# Altium PCB DO NOT USELKAS-EPS_PCB_V2I2.PcbDoc
Units mil, origin at the board's own origin, x right, y up, seen from the top; angles counter-clockwise.
Board outline 2181 x 1417 mil, 2 copper layers (Top Layer, Bottom Layer); 49 components, 66 nets, 230 pads, 22 vias.
Unrouted connection lines stored in the file: 19.
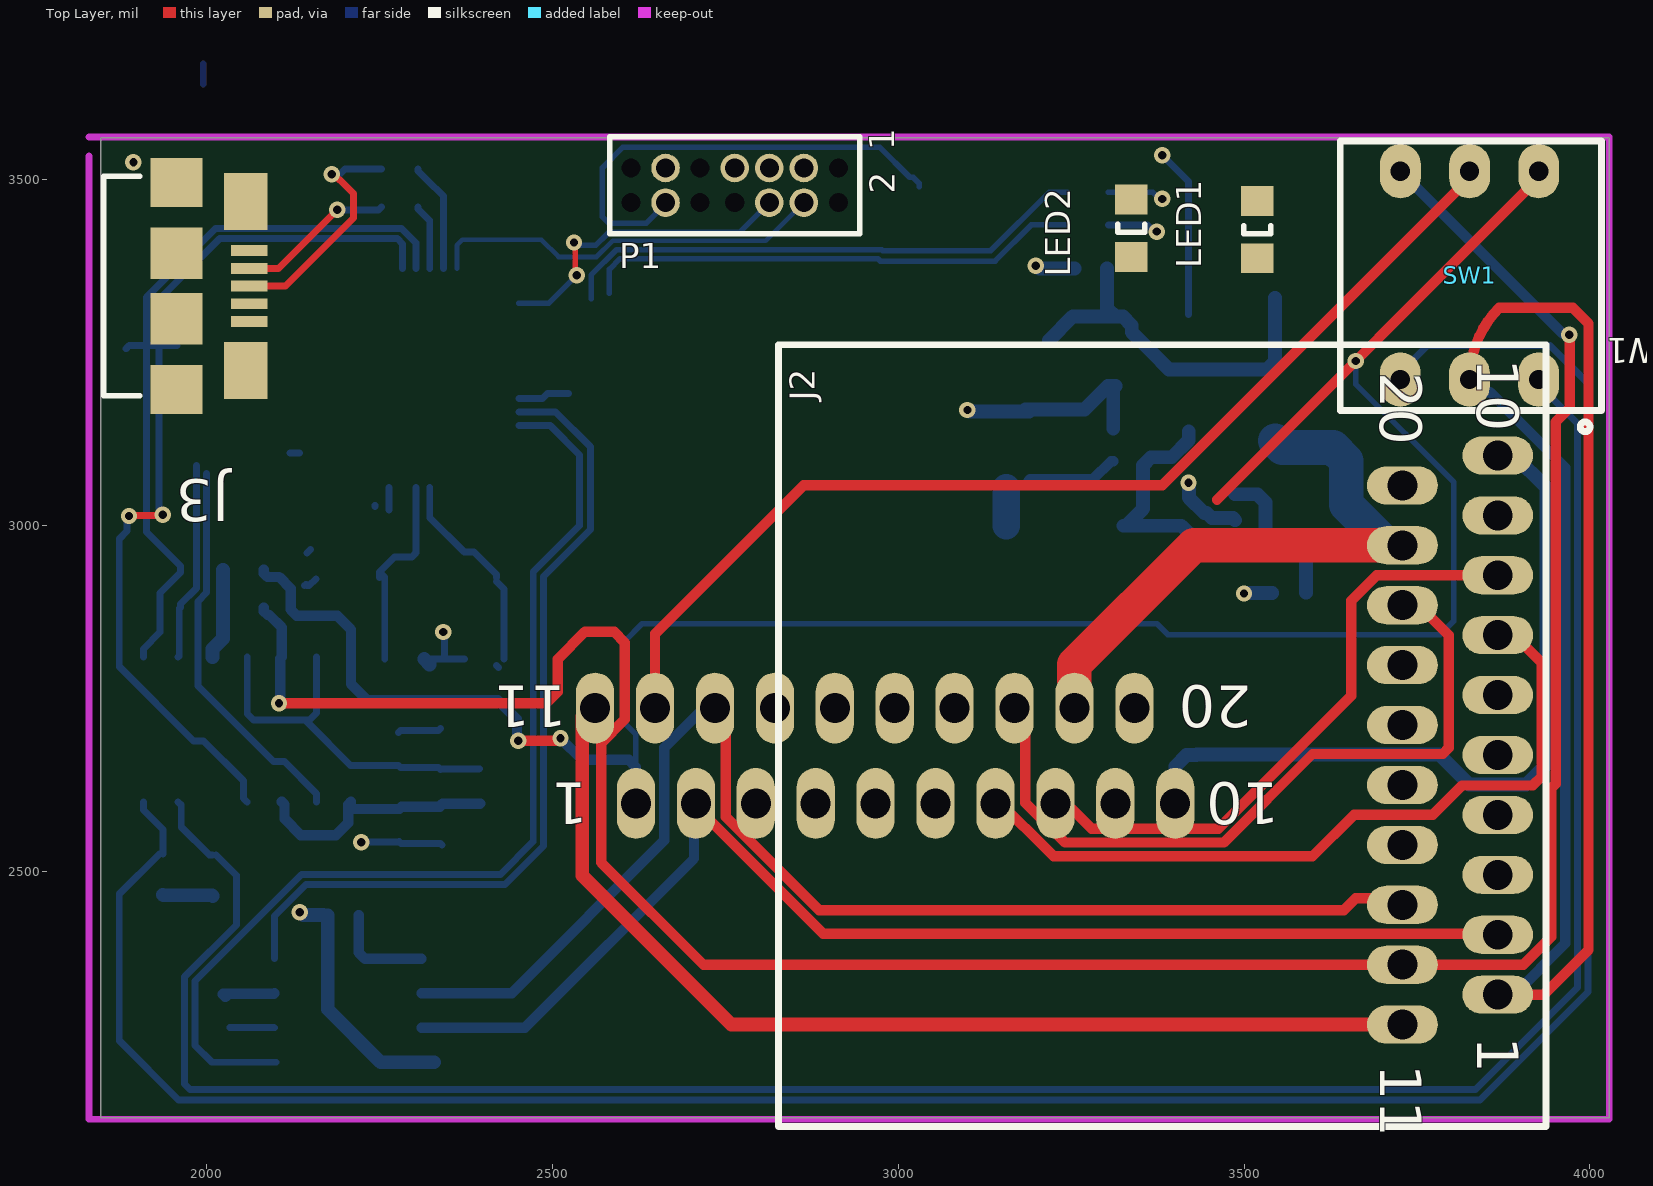
[diagram p0: Top Layer view]
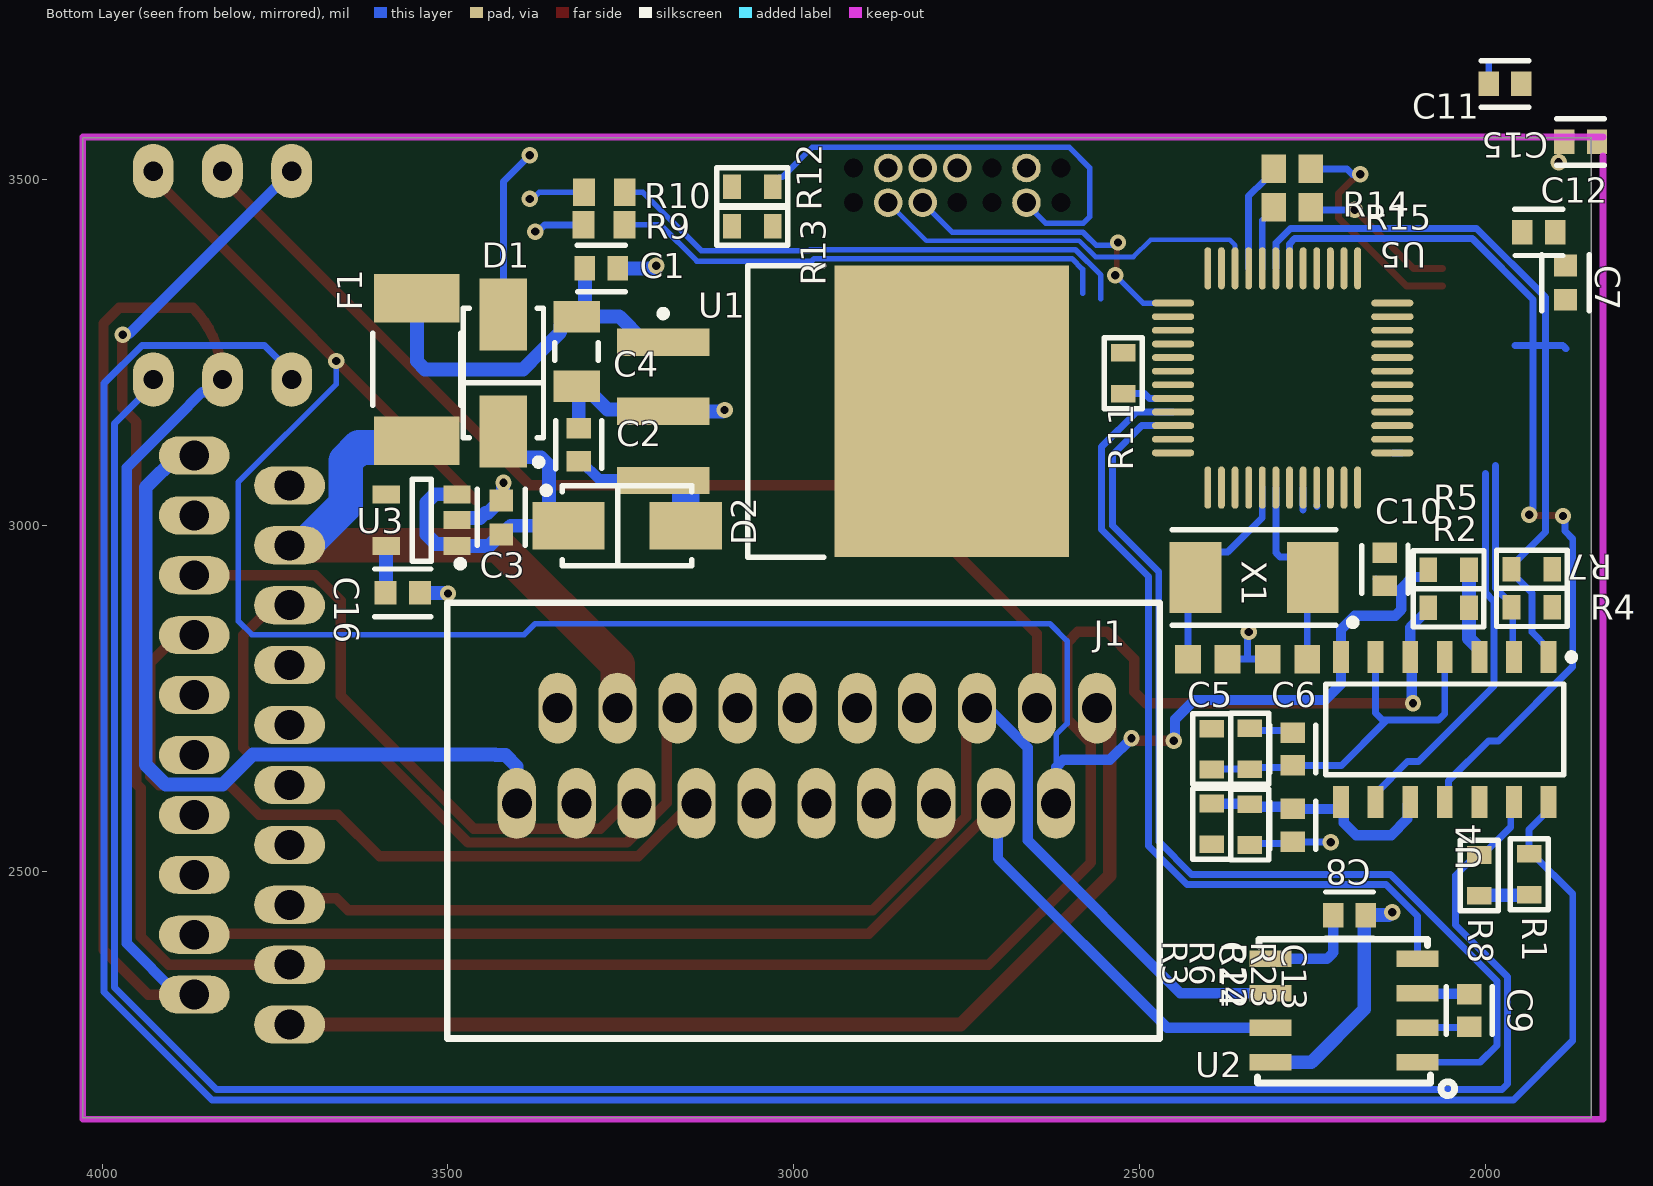
[diagram p1: Bottom Layer view, seen from below]
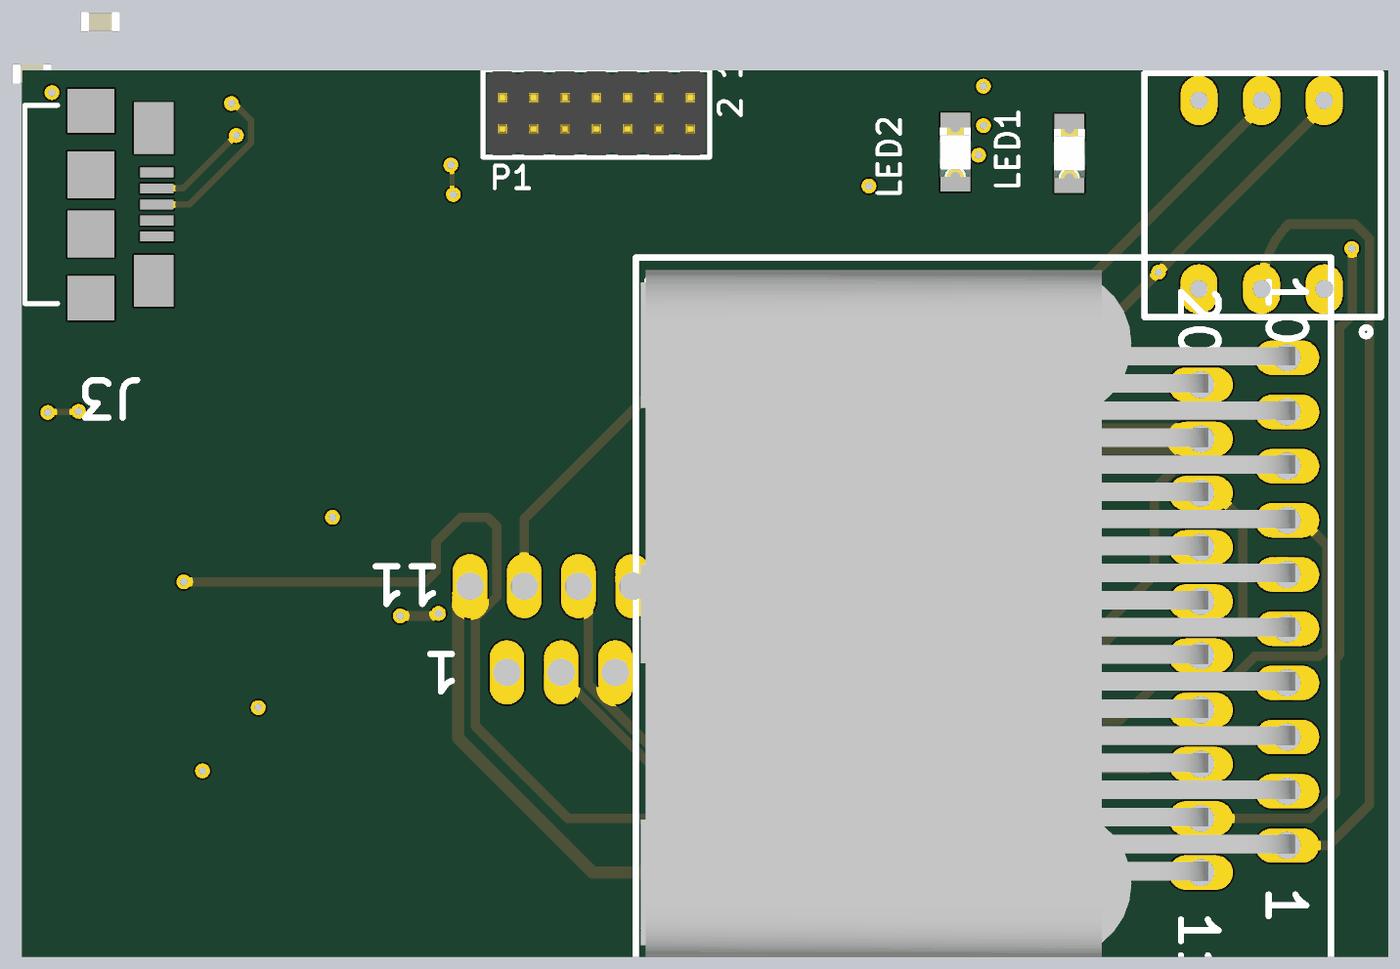
[diagram p2: 3D render of the assembled board from above, using the file's embedded part models]
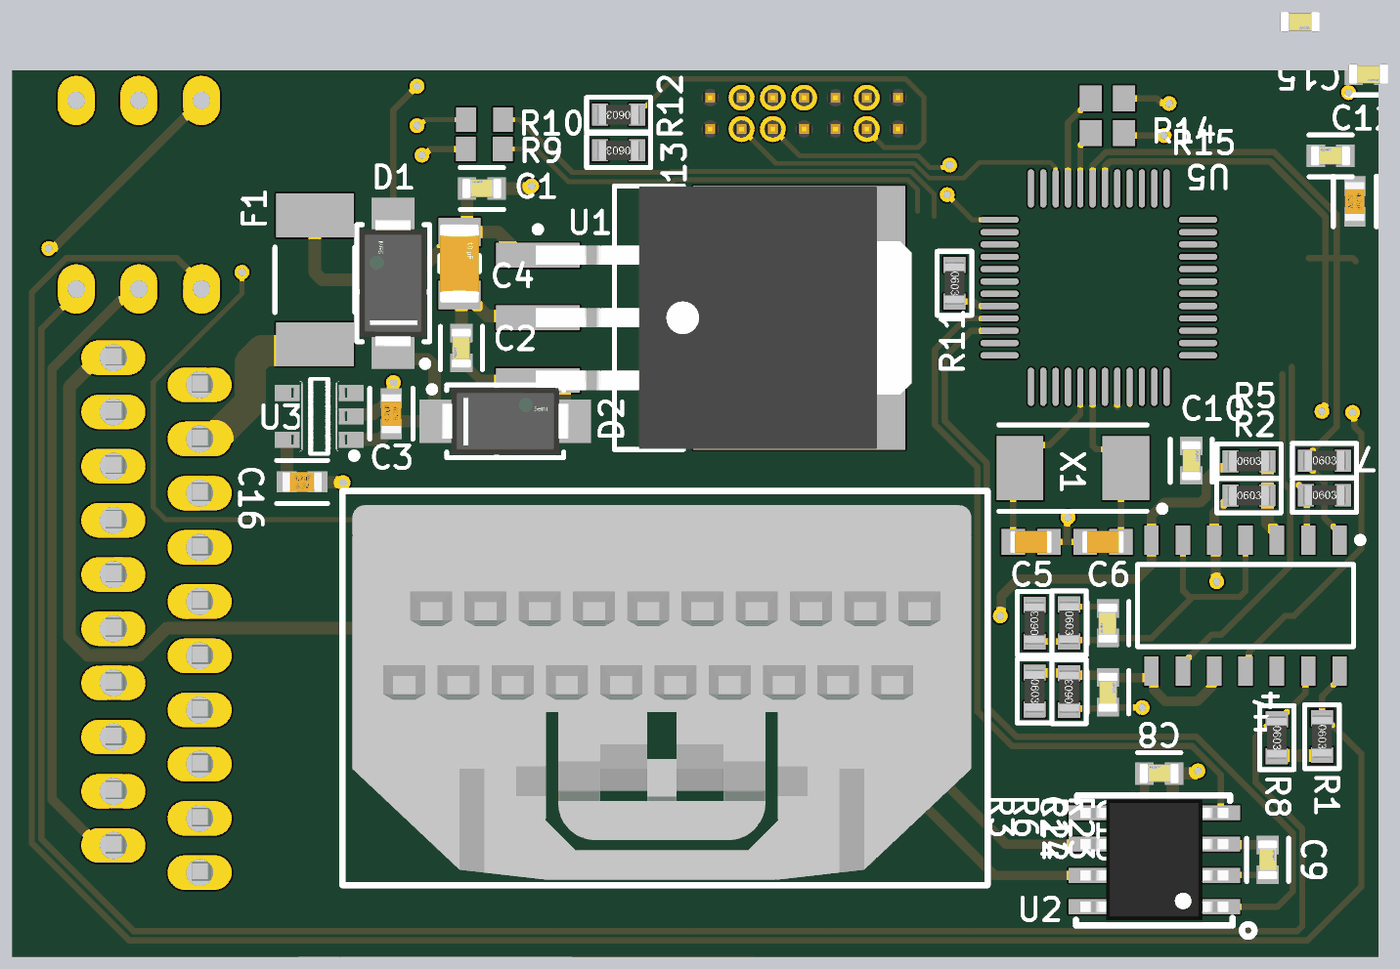
[diagram p3: 3D render of the assembled board from below, using the file's embedded part models]

## Layer stack, top to bottom
Top Solder: solder mask 0.4, Solder Resist, Dk 3.5
Top Layer: signal copper 1.378
Dielectric1: dielectric 12.6, FR-4, Dk 4.8
Bottom Layer: signal copper 1.378
Bottom Solder: solder mask 0.4, Solder Resist, Dk 3.5

## Board outline
1847,2144 4028,2144 4028,3561 1847,3561

## Design rules (kind name [scope] priority, off if disabled: settings)
BoardOutlineClearance [All] p1: gap=7.87 ignorepadtopadclearanceinfootprint=FALSE
Clearance [All] p1: gap=5 ignorepadtopadclearanceinfootprint=FALSE except(9.84: Arc-Hole Track-Hole SMDPad-Hole THPad-Hole Via-Hole Fill-Hole Poly-Hole Region-Hole Text-Hole)
ComponentClearance [All] p1: gap=5 collisioncheckmode=3 verticalgap=5 showdistances=TRUE
DiffPairsRouting [All] p1: maxlimit=10 minlimit=5 mostfreqgap=5 toplayer_minwidth=5 toplayer_maxwidth=1000 toplayer_prefwidth=5 bottomlayer_minwidth=5 bottomlayer_maxwidth=1000 bottomlayer_prefwidth=5 maxuncoupledlength=500
Height [All] p1: minheight=0 maxheight=71497.94 prefheight=500
HoleSize [All] p1: absolutevalues=TRUE maxlimit=248.03 minlimit=11.81 maxpercent=80.000 minpercent=20.000
HoleToHoleClearance [All] p1: gap=9.84 allowstackedmicrovias=FALSE
MinimumAnnularRing [All] p1: minimumring=3
MinimumSolderMaskSliver [All] p1: minsoldermaskwidth=0
PlaneClearance [All] p1: clearance=5
PlaneConnect PlaneConnectPowerPads [InPadClass('PowerPads')] p1: planeconnectstyle=Direct reliefexpansion=20 reliefentries=4 reliefconductorwidth=10 reliefairgap=10
PlaneConnect [All] p2: pad.planeconnectstyle=Relief pad.reliefexpansion=11.81 pad.reliefentries=4 pad.reliefconductorwidth=39.37 pad.reliefairgap=5 via.planeconnectstyle=Direct via.reliefexpansion=11.81 via.reliefentries=4 via.reliefconductorwidth=5 via.reliefairgap=5
PolygonConnect PolygonConnectPowerPads [All vs (InPadClass('PowerPads'))] p1: connectstyle=Direct reliefconductorwidth=10 reliefentries=4 polygonreliefangle="90 Angle" airgapwidth=10
PolygonConnect [All] p2: thpad.connectstyle=Relief thpad.reliefconductorwidth=39.37 thpad.reliefentries=4 thpad.polygonreliefangle="90 Angle" thpad.airgapwidth=5 smdpad.connectstyle=Relief smdpad.reliefconductorwidth=39.37 smdpad.reliefentries=4 smdpad.polygonreliefangle="90 Angle" smdpad.airgapwidth=5 via.connectstyle=Direct via.reliefconductorwidth=5 via.reliefentries=4 via.polygonreliefangle="90 Angle" via.airgapwidth=5
RoutingVias [All] p1: holewidth=11.81 width=23.62 viastyle="Through Hole" minholewidth=11.81 minwidth=23.62 maxholewidth=100 maxwidth=259.84
SilkToSilkClearance [All] p1: silktosilkclearance=0
SilkToSolderMaskClearance [IsPad] p1: minsilkscreentomaskgap=5 clearancetoexposedcopper=TRUE
SolderMaskExpansion [All] p1: expansion=2.95 istentingtop=FALSE
Width [All] p1: maxlimit=1000 minlimit=5 preferedwidth=5 minimp=50.000000 maximp=50.000000 favimp=50.000000
20 further rules are at their usual default settings.

## Classes and differential pairs
differential pair USB_R: +USB_R_P -USB_R_N
differential pair USB: +USB_P -USB_N

## Components (designator, comment, footprint, x,y, rotation, side; value= is the part's Value field where it differs from the comment)
C1 "C0603C104M3RACTU" FP-C0603C-CF-MFG 3278.38,3372 r180 bottom value="0.10 μF"
C2 "C0603C104M3RACTU" FP-C0603C-CF-MFG 3311,3117 r90 bottom value="0.10 μF"
C3 "CL10B475KQ8NQNC" FP-CL10-IPC_C 3423,3012 r90 bottom value=4.7uF
C4 "CL31A106KBHNNNE" FP-CL31-IPC_C 3314,3252 r270 bottom value=10uF
C5 "GRM1885C1H220JA01D" CAPC1608X90X35ML10T15 2401.57,2807.09 r180 bottom
C6 "GRM1885C1H220JA01D" CAPC1608X90X35ML10T15 2286.42,2807.09 r0 bottom
C7 "CL10B475KQ8NQNC" FP-CL10-IPC_C 1884.48,3351.28 r270 bottom value=4.7uF
C8 "C0603C104M3RACTU" FP-C0603C-CF-MFG 2196.85,2437.01 r180 bottom value="0.10 μF"
C9 "C0603C104M3RACTU" FP-C0603C-CF-MFG 2023.62,2299.21 r270 bottom value="0.10 μF"
C10 "C0603C104M3RACTU" FP-C0603C-CF-MFG 2145.67,2937.01 r270 bottom value="0.10 μF"
C11 "C0603C104M3RACTU" FP-C0603C-CF-MFG 1971.85,3638.61 r0 bottom value="0.10 μF"
C12 "C0603C104M3RACTU" FP-C0603C-CF-MFG 1923.23,3424.21 r180 bottom value="0.10 μF"
C13 "C0603C104M3RACTU" FP-C0603C-CF-MFG 2278.85,2677.19 r90 bottom value="0.10 μF"
C14 "C0603C104M3RACTU" FP-C0603C-CF-MFG 2278.73,2566.93 r270 bottom value="0.10 μF"
C15 "C0603C104M3RACTU" FP-C0603C-CF-MFG 1862.57,3554.85 r0 bottom value="0.10 μF"
C16 "CL10B475KQ8NQNC" FP-CL10-IPC_C 3565.35,2903 r180 bottom value=4.7uF
D1 "SS14" FP-403AE-MFG 3420,3220.65 r270 bottom
D2 "SS14" FP-403AE-MFG 3241,3000 r0 bottom
F1 "1812L050/30PR" LFUS-1812L05030PR_V 3545,3226.05 r90 bottom
J1 "MX34020SF1" MX34020SF1 3391,2808.63 r180 bottom
J2 "MX34020NF1" MX34020NF1 3866.8,3101.61 r270 top
J3 "10118192-0001LF" FCI-10118192-0001LF-5_V 1956.69,3346.46 r270 top
LED1 "150080SS75000" 0805_A 3519,3428 r90 top
LED2 "150080BS75000" 0805_A 3337,3430 r90 top
P1 "62201421121" 62201421121 2763.78,3492.13 r180 top
R1 "4K7" R0603 1937.01,2496.06 r270 bottom
R2 "4K7" R0603 2053.54,2881.16 r180 bottom
R3 "4K7" R0603 2395.73,2568.93 r270 bottom
R4 "4K7" R0603 1933.07,2881.89 r180 bottom
R5 "4K7" R0603 2053.49,2936.16 r180 bottom
R6 "4K7" R0603 2340.73,2567.93 r90 bottom
R7 "4K7" R0603 1933.07,2937 r180 bottom
R8 "4K7" R0603 2009.1,2494.42 r270 bottom
R9 "RC0603FR-07560RL" RESC1608X55X25ML10T15 3274.47,3435 r0 bottom
R10 "RC0603FR-07560RL" RESC1608X55X25ML10T15 3274,3482 r0 bottom
R11 "4K7" R0603 2523.62,3220.47 r270 bottom
R12 "4K7" R0603 3060,3490 r0 bottom
R13 "4K7" R0603 3060,3433 r0 bottom
R14 "CRCW060322R0JNTA" RESC1609X50X30ML10T20 2279.53,3460.63 r180 bottom value=22R
R15 "CRCW060322R0JNTA" RESC1609X50X30ML10T20 2279.53,3515.75 r180 bottom value=22R
R22 "4K7" R0603 2395.73,2677.17 r90 bottom
R23 "4K7" R0603 2340.73,2677.69 r270 bottom
SW1 "76STC02T" 76STC02T 3826,3362 r180 top
U1 "UA7805CKTTR" KTT0003A_V 2929.13,3165.35 r180 bottom
U2 "MCP2562FD-E/SN" MCP2561 2204.72,2299.21 r0 bottom
U3 "MIC5504-3.3YM5-TR" FP-SOT23-5LD-PL-1-MFG 3538,3008 r0 bottom
U4 "LM339DR2G" ONSC-SOIC-14-751A-03_V 2059,2705.44 r270 bottom
U5 "STM32F103C6T7ATR" STM-LQFP48_L 2293.31,3213.58 r90 bottom
X1 "ABM7-8.000MHZ-D2Y-T" ABRA-ABM7-2_V 2334.65,2925.2 r0 bottom

## Footprints (in the part's own frame and the unit in brackets; to place one, negate y for a bottom-side part, rotate by r counter-clockwise, add the part's x,y. Pads: shape width x height; smd on the part's side, far side on the other; paste and mask are expansions set on the pad)
76STC02T [mm] "Switch Rocker Arm"
  oval 1.5x2 hole 0.71: 1A(-2.538,3.827) 1B(-2.542,-3.827) 2A(2.542,3.827) 2B(2.538,-3.827) C1(0.002,3.827) C2(-0.002,-3.827)
  silkscreen extent -4.85,-4.93 4.75,5.74
0805_A [mm] "Chip LED, 2-Leads, Body 2.0x1.3mm, IPC Medium Density"
  rect 1.1x1.2 smd: 1(-1.05,0) 2(1.05,0)
  silkscreen extent -0.15,-0.5 0.15,0.5, body extent -1,-0.63 1,0.62, height 0.68
62201421121 [mm] "Pin Header, pitch 1.27 mm, THT, Vertical, dual row, 14p"
  round 0 hole 0.7 unplated: 1(-3.81,-0.635) 2(-3.81,0.635) 8(0,0.635) 9(1.27,-0.635) 10(1.27,0.635) 13(3.81,-0.635) 14(3.81,0.635)
  round 1.05 hole 0.7: 3(-2.54,-0.635) 4(-2.54,0.635) 5(-1.27,-0.635) 6(-1.27,0.635) 7(0,-0.635) 11(2.54,-0.635) 12(2.54,0.635)
  silkscreen extent -4.59,-1.78 4.59,1.78, body extent -4.44,-1.7 4.45,1.7, height 5.33
ABRA-ABM7-2_V [mm] "SMD, 2-Leads, Body 6x3.5mm"
  rect 1.9x2.6 smd: 1(-2.15,0) 2(2.15,0)
  silkscreen extent -3.75,-1.75 3,1.78, body extent -3,-1.75 3,1.75, height 1.4
CAPC1608X90X35ML10T15 [mm] "Chip Capacitor, 2-Leads, Body 1.7x0.9mm, IPC Low Density"
  rect 0.95x1.05 smd: 1(-0.725,0) 2(0.725,0)
  body extent -0.85,-0.45 0.85,0.45, height 0.9
FCI-10118192-0001LF-5_V [mm] "SMD, 5-Leads, Body 8.05x5.77mm, Pitch 0.65mm"
  rect 0.4x1.35 smd: 1(-1.3,2.675) 2(-0.65,2.675) 3(0,2.675) 4(0.65,2.675) 5(1.3,2.675)
  rect 2.1x1.6 smd: 6(-3.1,2.55) 7(3.1,2.55)
  rect 1.8x1.9 smd: 8(-3.8,0) 9(3.8,0)
  rect 1.9x1.9 smd: 10(-1.2,0) 11(1.2,0)
  silkscreen extent -4.03,-2.67 4.03,-1.35, body extent -4.03,-2.67 4.03,3.1, height 2.7
FP-403AE-MFG [mm]
  rect 2.65x1.75 smd paste+0 mask+0: 1(-2.15,0) 2(2.15,0)
  silkscreen extent -2.37,-1.48 3.39,1.48, body extent -2.6,-1.36 2.6,1.36, height 2.5
FP-C0603C-CF-MFG [mm]
  rect 0.75x0.9 smd paste+0 mask+0: 1(-0.6,0) 2(0.6,0)
  silkscreen extent -0.87,-0.85 0.88,0.85, body extent -0.8,-0.4 0.8,0.4, height 0.87
FP-CL10-IPC_C [mil]
  rect 31.73x33.79 smd paste+0 mask+0: 1(-24.65,0) 2(24.65,0)
  silkscreen extent -41,-34 41,34, body extent -31,-16 31,16, height 37
FP-CL31-IPC_C [mil]
  rect 45.45x67.17 smd: 1(-50.23,0) 2(50.23,0)
  silkscreen extent -13,-31 13,31, body extent -63,-31 63,31, height 71
FP-SOT23-5LD-PL-1-MFG [mm]
  rect 1x0.66 smd paste+0 mask+0: 1(-1.3,0.95) 2(-1.3,0) 3(-1.3,-0.95) 4(1.3,-0.95) 5(1.3,0.95)
  silkscreen extent -1.54,-1.5 0.35,1.72, body extent -1.4,-1.45 1.4,1.45, height 1.45
KTT0003A_V [mm] "DPAK, 3-Leads, Body 10.65x9.65mm, Pitch 2.54mm"
  rect 3.4x1 smd: 1(-6.6,2.54) 2(-6.6,0) 3(-6.6,-2.54)
  rect 8.6x10.7 smd: 4(4,0)
  silkscreen extent -6.73,-5.35 -0.7,5.35, body extent -6.68,-5.32 8.56,5.32, height 4.83
LFUS-1812L05030PR_V [mm] "SMD, 2-Leads, Body 4.55x3.24mm"
  rect 1.78x3.15 smd: 1(-2.615,0) 2(2.615,0)
  silkscreen extent -1.33,-1.62 1.33,1.62, body extent -2.27,-1.62 2.27,1.62, height 1
MCP2561 [mm] "SOIC 8 SN type"
  rect 1.55x0.6 smd: 1(-2.7,1.905) 2(-2.7,0.635) 3(-2.7,-0.635) 4(-2.7,-1.905) 5(2.7,-1.905) 6(2.7,-0.635) 7(2.7,0.635) 8(2.7,1.905)
  silkscreen extent -4.06,-2.62 3.17,3.12, body extent -3,-2.45 3,2.45, height 1.75
MX34020NF1 [mm] "Receptical with male pins"
  oval 1.4x2.6 hole 1.1: 1(19.8,0) 2(17.6,0) 3(15.4,0) 4(13.2,0) 5(11,0) 6(8.8,0) 7(6.6,0) 8(4.4,0) 9(2.2,0) 10(0,0) 11(20.9,-3.5) 12(18.7,-3.5) 13(16.5,-3.5) 14(14.3,-3.5) 15(12.1,-3.5) 16(9.9,-3.5) 17(7.7,-3.5) 18(5.5,-3.5) 19(3.3,-3.5) 20(1.1,-3.5)
  round 0 all layers, no hole: ""(-0.5,-9.3) ""(21.5,-9.3)
  silkscreen extent -4.06,-26.42 24.64,1.78, body extent -3.56,-26.21 24.34,0.31, height 16
MX34020SF1 [mm] "Plug without pins"
  oval 1.4x2.6 hole 1.1: 1(19.558,-5.334) 2(17.358,-5.334) 3(15.158,-5.334) 4(12.958,-5.334) 5(10.758,-5.334) 6(8.558,-5.334) 7(6.358,-5.334) 8(4.158,-5.334) 9(1.958,-5.334) 10(-0.242,-5.334) 11(21.058,-1.834) 12(18.858,-1.834) 13(16.658,-1.834) 14(14.458,-1.834) 15(12.258,-1.834) 16(10.058,-1.834) 17(7.858,-1.834) 18(5.658,-1.834) 19(3.458,-1.834) 20(1.258,-1.834)
  silkscreen extent -2.79,-13.97 23.37,2.03, body extent -2.39,-13.75 22.71,1.45, height 21
ONSC-SOIC-14-751A-03_V [mm] "SOIC, 14-Leads, Body 8.75x4mm, Pitch 1.27mm"
  rect 1.18x0.58 smd: 1(-2.66,3.81) 2(-2.66,2.54) 3(-2.66,1.27) 4(-2.66,0) 5(-2.66,-1.27) 6(-2.66,-2.54) 7(-2.66,-3.81) 8(2.66,-3.81) 9(2.66,-2.54) 10(2.66,-1.27) 11(2.66,0) 12(2.66,1.27) 13(2.66,2.54) 14(2.66,3.81)
  silkscreen extent -2.78,-4.37 1.67,4.77, body extent -2,-4.38 2,4.38, height 1.75
R0603 [mm]
  rect 0.65x0.9 smd: 1(-0.75,0) 2(0.75,0)
  silkscreen extent -1.3,-0.7 1.3,0.7, body extent -1.05,-0.4 1.05,0.4, height 0.5
RESC1608X55X25ML10T15 [mm] "Chip Resistor, 2-Leads, Body 1.70x0.90mm, IPC Low Density"
  rect 0.8x1 smd: 1(-0.75,0) 2(0.75,0)
  body extent -0.85,-0.45 0.85,0.45, height 0.55
RESC1609X50X30ML10T20 [mm] "Chip Resistor, 2-Leads, Body 1.55x0.85mm, IPC Low Density"
  rect 0.9x1.05 smd: 1(-0.675,0) 2(0.675,0)
  body extent -0.82,-0.48 0.82,0.48, height 0.5
STM-LQFP48_L [mm] "QFP, 48-Leads, Body 7x7mm, Pitch 0.5mm, IPC High Density"
  oval 1.55x0.25 smd: 1(-4.025,2.75) 2(-4.025,2.25) 3(-4.025,1.75) 4(-4.025,1.25) 5(-4.025,0.75) 6(-4.025,0.25) 7(-4.025,-0.25) 8(-4.025,-0.75) 9(-4.025,-1.25) 10(-4.025,-1.75) 11(-4.025,-2.25) 12(-4.025,-2.75) 25(4.025,-2.75) 26(4.025,-2.25) 27(4.025,-1.75) 28(4.025,-1.25) 29(4.025,-0.75) 30(4.025,-0.25) 31(4.025,0.25) 32(4.025,0.75) 33(4.025,1.25) 34(4.025,1.75) 35(4.025,2.25) 36(4.025,2.75)
  oval 0.25x1.55 smd: 13(-2.75,-4.025) 14(-2.25,-4.025) 15(-1.75,-4.025) 16(-1.25,-4.025) 17(-0.75,-4.025) 18(-0.25,-4.025) 19(0.25,-4.025) 20(0.75,-4.025) 21(1.25,-4.025) 22(1.75,-4.025) 23(2.25,-4.025) 24(2.75,-4.025) 37(2.75,4.025) 38(2.25,4.025) 39(1.75,4.025) 40(1.25,4.025) 41(0.75,4.025) 42(0.25,4.025) 43(-0.25,4.025) 44(-0.75,4.025) 45(-1.25,4.025) 46(-1.75,4.025) 47(-2.25,4.025) 48(-2.75,4.025)
  body extent -3.5,-3.5 3.5,3.5, height 1.6

## Part data
C1 C2 C8 C9 C10 C11 C12 C13 C14 C15: library part CMP-2006-03065-2, "CAP CER 0.1UF 25V X7R 0603", Capacitance="0.1 μF", Manufacturer=KEMET, Package=C0603C-CF, Temperature="-55°C to +125°C", Temperature Characteristic=X7R, Temperature Coefficient=30ppm/°C, Temperature Range High=+125°C, Temperature Range Low=-55°C, Tolerance=0.2, Voltage Rating="25 V", Automotive=Yes, Automotive Grade="Grade 1", Category=Cap, ComponentLink2Description=Datasheet, ComponentLink2URL=https://api.kemet.com/component-edge/download/datasheet/C0603C100J5GACAUTO.pdf, Device Class L1="Passive Components", Device Class L2=Capacitors, Device Class L3="Ceramic Capacitors", Digikey Description="CAP CER 0.1UF 25V X7R 0603", Height=0.87mm, Lead Free=Yes, Manufacturer Part Number=C0603C104M3RACTU, Material=Ceramic, Mouser Description="Multilayer Ceramic Capacitors MLCC - SMD/SMT 25volts 0.1uF X7R 20%", Octopart=https://octopart.com/c0603c104m3ractu-kemet-95914, RoHS=TRUE
C3 C7 C16: library part CMP-2000-06096-2, "CAP CER 4.7UF 6.3V X7R 0603", Capacitance=4.7uF, Manufacturer=Samsung, Package=CL10, Temperature="-55°C to +125°C", Temperature Characteristic=X7R, Temperature Coefficient=15%, Temperature Range High=+125°C, Temperature Range Low=-55°C, Tolerance=10%, Voltage Rating=6.3V, Automotive=No, Category=Cap, ComponentLink2Description=Datasheet, ComponentLink2URL=http://www.samsungsem.com/kr/support/product-search/mlcc/__icsFiles/afieldfile/2018/07/24/CL10B475KQ8NQNC.pdf, Device Class L1="Passive Components", Device Class L2=Capacitors, Device Class L3="Ceramic Capacitors", Digikey Description="CAP CER 4.7UF 6.3V X7R 0603", Height=0.95mm, Ipc Land Pattern Name=CAPC16080X80, Lead Free=Yes, Manufacturer Part Number=CL10B475KQ8NQNC, Material=Ceramic, Mouser Description="C Series 0402 4.7 uF 6.3 V ±20 % Tolerance X5R SMT Multilayer Ceramic Capacitor", Octopart=https://octopart.com/cl10b475kq8nqnc-samsung-24957976, RoHS=TRUE
C4: library part CMP-13271-000016-1, "CAP CER 10UF 50V X5R 1206", Capacitance=10uF, Manufacturer=Samsung, Package=CL31, Temperature="-55°C to +85°C", Temperature Characteristic=X5R, Temperature Coefficient=15%, Temperature Range High=+85°C, Temperature Range Low=-55°C, Tolerance=10%, Voltage=50V, Automotive=No, Category=Cap, ComponentLink2Description=Datasheet, ComponentLink2URL=http://www.samsungsem.com/kr/support/product-search/mlcc/__icsFiles/afieldfile/2018/06/21/CL31A106KBHNNNE.pdf, Device Class L1="Passive Components", Device Class L2=Capacitors, Device Class L3="Ceramic Capacitors", Digikey Description="CAP CER 10UF 50V X5R 1206", Height=1.8mm, Ipc Land Pattern Name=CAPC320160X160, Lead Free=Yes, Manufacturer Part Number=CL31A106KBHNNNE, Material=Ceramic, Octopart=https://octopart.com/cl31a106kbhnnne-samsung-19832778, RoHS=TRUE, Voltage Rating=50V
C5 C6: library part CMP-2000-04945-1, "Chip Capacitor, 22 pF, +/- 5%, 50 V, -55 to 125 degC, 0603 (1608 Metric), RoHS, Tape and Reel", Capacitance=22pF, Case Size/Dimension=0603, Dielectric=C0G, Manufacturer=Murata, Package Description="2-Pin Surface Mount Device, Body 1.6 x 0.8 mm", Package Reference=603, Rated Voltage=50V, Tolerance (%)=±5%, Datasheet URL=https://datasheet.ciiva.com/11786/0900766b807a1cab-11786398.pdf, Datasheet Version=Jul-06, Manufacturer URL=http://www.murata.com/
D1 D2: library part CMP-2000-04943-2, "DIODE SCHOTTKY 40V 1A SMA", Forward Current=1A, Manufacturer="ON Semiconductor", Max Junction Temp=+125°C, Max Repetitive Reverse Voltage=40V, Max Surge Forward Current=40A, Package=403AE, Peak Reverse Current=0.2mA, Temperature="-65°C to +125°C", Temperature Range Low=-65°C, Automotive=No, Category=Diode, ComponentLink2Description=Datasheet, ComponentLink2URL=https://www.onsemi.com/pub/Collateral/SS19-D.PDF, Device Class L1="Discrete Semiconductors", Device Class L2=Diodes, Device Class L3="Schottky Diodes", Digikey Description="DIODE SCHOTTKY 40V 1A SMA", Height=2.5mm, Lead Free=Yes, Manufacturer Part Number=SS14, Mouser Description="Schottky Diodes & Rectifiers SMA 40V 1.0A", Octopart=https://octopart.com/ss14-on+semiconductor-29205033, RoHS=TRUE, Standoff Height=0.05mm, Temperature Range High=+125°C
F1: library part CMP-2000-05508-1, "PTC Resettable Fuse, 0.8 W, 30 V, -40 to 85 degC, 2-Pin SMD, RoHS, Tape and Reel", Current - Hold (Ih) (Max)=500mA, Current - Max=100A, Current - Trip (It)=1A, Manufacturer=Littelfuse-Inc., Package / Case=1812(4532Metric),Concave, Package Description="2-Pin Surface Mount Device, Body 4.55 x 3.24 mm", Package Reference=1812, Voltage - Max=30V, Category=CircuitProtection, Datasheet URL=http://www.littelfuse.com/~/media/electronics/datasheets/resettable_ptcs/littelfuse_ptc_1812l_datasheet.pdf.pdf, Datasheet Version=02/2016, Family=PTCResettableFuses, Manufacturer URL=http://www.littelfuse.com/, Mounting Technology=SurfaceMount, Packaging=Tape&Reel(TR), R Min/Max=0.150~1.000Ohm, Series=POLY-FUSE®,1812L, Time to Trip=0.15s
J1: "Automotive Connectors Sckt HOUSING 20P", Color=Grey, Current Rating=3A, Manufacturer="JAE Electronics", Max Operating Temperature=85°C, Min Operating Temperature=-40°C, Package Quantity=192, Supplier Part Number 1=670-2925-ND, Category=Connectors, ComponentLink1Description=https://datasheet.ciiva.com/11742/0900766b80fc15d5-11742077.pdf?src-supplier=RSComponents, ComponentLink1URL=https://datasheet.ciiva.com/11742/0900766b80fc15d5-11742077.pdf?src-supplier=RSComponents, ComponentLink2Description=https://datasheet.ciiva.com/4553/sj038752-64597-4553699.pdf?src-supplier=Mouser, ComponentLink2URL=https://datasheet.ciiva.com/4553/sj038752-64597-4553699.pdf?src-supplier=Mouser, ComponentLink3Description=https://datasheet.ciiva.com/6739/614004-6739335.pdf?src-supplier=Newark, ComponentLink3URL=https://datasheet.ciiva.com/6739/614004-6739335.pdf?src-supplier=Newark, ComponentLink4Description=https://datasheet.ciiva.com/762/transportation-pg-v2-2-762885.pdf?src-supplier=Digi-Key, ComponentLink4URL=https://datasheet.ciiva.com/762/transportation-pg-v2-2-762885.pdf?src-supplier=Digi-Key, ComponentLink5Description=https://datasheet.ciiva.com/5821/1009688-5821398.pdf?src-supplier=Farnell, ComponentLink5URL=https://datasheet.ciiva.com/5821/1009688-5821398.pdf?src-supplier=Farnell, ComponentLink6Description=https://datasheet.ciiva.com/7648/1009712-7648886.pdf?src-supplier=Element14, ComponentLink6URL=https://datasheet.ciiva.com/7648/1009712-7648886.pdf?src-supplier=Element14, Connector Type=Receptacle,Socket,Rectangular, Contact Material="Copper Alloy,Copper", Contact Plating=Tin, Depth=21.3mm, Gender=Female, Height=14mm, Housing Material=PPE, Manufacturer Part Number=MX34020SF1, Mount="Free Hanging,Cable", Number of Contacts=20, Number of Positions=20, Number of Rows=2, Packaging=Tray, Pitch=0.087inch, Pricing 1="1=0.73000, 10=0.63800, 25=0.60000, 50=0.57500, 100=0.55000, 250=0.50000, 576=0.45000, 1152=0.40000, 2880=0.36250 (USD)", RoHS=Yes, Row Spacing=0.118inch, Stock 1=3393, Supplier 1=Digi-Key, Termination=Crimp, Width=25.1mm
J2: "JAE MX34 Series, 2.2mm Pitch 20 Way 2 Row Right Angle PCB Header, Solder Termination, 3A", Color=Grey, Current Rating=3A, Manufacturer="JAE Electronics", Package Quantity=288, Supplier Part Number 1=670-2924-ND, Category=Connectors, ComponentLink1Description=https://datasheet.ciiva.com/7621/1009688-7621584.pdf?src-supplier=Element14, ComponentLink1URL=https://datasheet.ciiva.com/7621/1009688-7621584.pdf?src-supplier=Element14, ComponentLink2Description=https://datasheet.ciiva.com/4554/sj038751-3818-4554108.pdf?src-supplier=Mouser, ComponentLink2URL=https://datasheet.ciiva.com/4554/sj038751-3818-4554108.pdf?src-supplier=Mouser, ComponentLink3Description=https://datasheet.ciiva.com/11754/0900766b80ddc6f0-11754159.pdf?src-supplier=RSComponents, ComponentLink3URL=https://datasheet.ciiva.com/11754/0900766b80ddc6f0-11754159.pdf?src-supplier=RSComponents, ComponentLink4Description=https://datasheet.ciiva.com/732/transportation-pg-v2-2-732931.pdf?src-supplier=Digi-Key, ComponentLink4URL=https://datasheet.ciiva.com/732/transportation-pg-v2-2-732931.pdf?src-supplier=Digi-Key, Connector Type="Male Pin,Rectangular", Contact Material=Brass, Contact Mating Length=0.303inch, Contact Plating=Tin, Gender=Male, Manufacturer Part Number=MX34020NF1, Mount="Through Hole", Number of Contacts=20, Number of Positions=20, Number of Rows=2, Orientation="Right Angle", Packaging=Rail/Tube, Pitch=0.087inch, Pricing 1="1=1.57000, 10=1.42100, 100=1.21800, 500=1.01500, 1000=0.87000, 5000=0.77140, 10000=0.75400 (USD)", REACH SVHC="No SVHC", RoHS=Yes, Row Spacing=0.118inch, Stock 1=10297, Supplier 1=Digi-Key, Termination=Solder
J3: library part CMP-2000-05118-1, "Micro USB B Type Receptacle, -55 to 85 degC, 5-Pin SMD, RoHS, Tape and Reel", Color=Black, Current Rating=1.8A, Flammability Rating=UL94V-0, Insulation Resistance=1000MOhms, Manufacturer=FCI, Operating Temperature Range=-55Cto+85C, Brand=FCI, Connector Type=MicroUSBTypeBreceptacle, Contact Material=CopperAlloy, Contact Plating=Gold, Datasheet URL=http://www.mouser.com/ds/2/154/10118192-793027.pdf, Datasheet Version="Rev. B, 05/2015", Factory Pack Quantity=1400, Gender=Female, Manufacturer URL=http://www.fci.com/, Mounting Angle=Right, Number of Contacts=5Contact, Packaging=Reel, Product=MicroUSBTypeBConnectors, Product Category=USBConnectors, RoHS=Details, Standard=USB2.0, Termination Style=SMD/SMT
LED1: library part CMP-1426-00010-1, "SMD mono-color Chip LED, WL-SMCW, Super Red", Color="Super Red", Manufacturer="Wuerth Elektronik", ComponentLink1Description="Manufacturer URL", ComponentLink1URL=http://www.we-online.com, ComponentLink2Description=Datasheet, ComponentLink2URL=http://katalog.we-online.com/led/datasheet/150080SS75000.pdf, PackageReference=0805_A, PartNumber=150080SS75000
LED2: library part CMP-1426-00008-1, "SMD mono-color Chip LED, WL-SMCW, Blue", Color=Blue, Manufacturer="Wuerth Elektronik", ComponentLink1Description="Manufacturer URL", ComponentLink1URL=http://www.we-online.com, ComponentLink2Description=Datasheet, ComponentLink2URL=http://katalog.we-online.com/led/datasheet/150080BS75000.pdf, PackageReference=0805_A, PartNumber=150080BS75000
P1: library part CMP-1502-00949-1, "THT Vertical Pin Header WR-PHD, Pitch 1.27 mm, Dual Row, 14 pins", Contact Resistance=20mOhm, Manufacturer="Wurth Elektronik", Operating Temperature=-40to105degC, Rated current=1A, Withstanding Voltage=500VAC, Working Voltage=100VAC, Datasheet URL=https://katalog.we-online.de/em/datasheet/62201421121.pdf, Gender=Male, Manufacturer URL=http://www.we-online.de, Mounting Technology=THT, Orientation=Vertical, Package Reference=62201421121, Packaging=Box, Part Number=62201421121, Pin Number=14, Pitch=1.27mm, Publisher=WurthElektronik, Row Number=Dual
R1 R2 R3 R4 R5 R6 R7 R8 R11 R12 R13 R22 R23: library part RMCF0603FT4K70, "Res Thick Film 0603 4.7K Ohm 1% 1/10W 100ppm/C Molded SMD SMD Paper T/R", Case Code (Imperial)=0603, Case Code (Metric)=1608, Manufacturer="Stackpole Electronics", Max Operating Temperature=155°C, Max Power Dissipation=100mW, Min Operating Temperature=-55°C, Resistance=4.7kR, Resistor Type="Thick Film", Supplier Part Number 1=RMCF0603FT4K70CT-ND, Temperature Coefficient=100ppm/°C, Tolerance=1%, Case/Package=0603, Category="Chip SMD Resistors", ComponentLink1Description=https://datasheet.ciiva.com/26835/getdatasheetpartid-486078-26835642.pdf?src-supplier=Verical, ComponentLink1URL=https://datasheet.ciiva.com/26835/getdatasheetpartid-486078-26835642.pdf?src-supplier=Verical, Contact Plating=Tin,Matte, Depth=0.8mm, Features="Automotive AEC-Q200", Height=0.022inch, Lead Free="Lead Free", Length=1.55mm, Manufacturer Part Number=RMCF0603FT4K70, Military Standard=Not, Mount="Surface Mount", Number of Terminations=2, Packaging="Tape and Reel", Power Rating=100mW, Pricing 1="1=0.10000, 10=0.01500, 100=0.00590, 1000=0.00265, 2500=0.00230 (USD)", Radiation Hardening=No, RoHS=Yes, Stock 1=1530231, Supplier 1=Digi-Key, Width=0.031inch
R9 R10: library part CMP-1659-00038-1, "Chip Resistor, 560 Ohm, +/- 1%, 0.1 W, -55 to 155 degC, 0603 (1608 Metric), RoHS, Tape and Reel", Case Code (Imperial)=0603, Case Code (Metric)=1608, Max Operating Temperature="155 degC", Min Operating Temperature="-55 degC", Power Rating="100 mW", Resistance=560R, Tolerance=1%, Voltage Rating="50 V", Case\Package=0603, ComponentLink1Description="Manufacturer URL", ComponentLink1URL=http://www.yageo.com/, ComponentLink2Description=Datasheet, ComponentLink2URL=http://www.yageo.com/documents/recent/PYu-RC_Group_51_RoHS_L_04.pdf, DatasheetVersion="Rev. 4, 02/2016", Height="0.45 mm", Length="1.6 mm", Mount="Surface Mount", PackageDescription="2-Pin Surface Mount Device, Body 1.6 x 0.8 mm", PackageReference=0603, Packaging="Tape and Reel", Pins=2, REACH SVHC="No SVHC", RoHSCompliant=true, Voltage Rating (DC)="50 V", Width="0.8 mm"
R14 R15: library part CMP-2000-03099-1, Manufacturer="Vishay Dale", Part Number=CRCW060322R0JNTA
SW1: "SWITCH TOGGLE DIP SPDT 150MA 30V / WIRED: / 1  2  3 / 4  5  6", Contact Current Rating=150mA, Manufacturer=Grayhill, Max Operating Temperature=85°C, Max Voltage Rating (DC)=30V, Min Operating Temperature=-40°C, Package Quantity=13, Supplier Part Number 1=GH7721-ND, Actuator Length=5.08mm, Actuator Type=Toggle, Body Material=Thermoplastic, Category="DIP Switches", ComponentLink1Description=https://datasheet.ciiva.com/16198/dip-series-76-and-78-spdt-16198550.pdf?src-supplier=Onlinecomponents.com, ComponentLink1URL=https://datasheet.ciiva.com/16198/dip-series-76-and-78-spdt-16198550.pdf?src-supplier=Onlinecomponents.com, ComponentLink2Description=https://datasheet.ciiva.com/2865/dip-series-76-and-78-spdt-2865964.pdf?src-supplier=Digi-Key, ComponentLink2URL=https://datasheet.ciiva.com/2865/dip-series-76-and-78-spdt-2865964.pdf?src-supplier=Digi-Key, Contact Material="Copper Alloy,Gold", Contact Plating=Gold, Current Rating=150mA, Depth=9.65mm, Electrical Life=2000Cycles, Lead Free="Lead Free", Length=0.78inch, Manufacturer Part Number=76STC02T, Max Current Rating=150mA, Mechanical Life=2000Cycles, Mount="Through Hole,PCB", Number of Circuits=4, Number of Positions=4, Orientation=Straight, Packaging=Rail/Tube, Pitch=0.1inch, Pricing 1="1=4.74000, 10=4.54200, 25=4.14720, 100=3.59410, 250=3.25836, 500=3.02140, 1000=2.80417, 2500=2.54745, 5000=2.36972 (USD)", Radiation Hardening=No, REACH SVHC="No SVHC", RoHS=Yes, Stock 1=149, Supplier 1=Digi-Key, Termination="PC Pins", Throw Configuration=SPDT, Voltage Rating=30V, Voltage Rating (DC)=30V, Washable=No
U1: library part CMP-1685-00014-1, "Fixed Positive Voltage Regulator, 7 to 25 V, 1.5 A, 0 to 125 degC, 3-Pin DDPAK (KTT), Green (RoHS / & no Sb/Br), Tape and Reel", Case Code (Imperial)=0603, Case Code (Metric)=1608, Max Operating Temperature="155 degC", Min Operating Temperature="-55 degC", Package Quantity=5000, Power Rating="100 mW", Resistance="220 Ohm", Tolerance=1%, Voltage Rating="50 V", Case\Package=0603, Code_JEDEC=TO-263, ComponentLink1Description="Manufacturer URL", ComponentLink1URL=http://www.ti.com/, ComponentLink2Description=Datasheet, ComponentLink2URL=http://www.ti.com/lit/ds/symlink/ua7805.pdf, DatasheetVersion="SLVS056P, 01/2015", Height="0.45 mm", Length="1.6 mm", Mount="Surface Mount", PackageDescription="3-Pin Surface Mount Device, Body 10.16 x 9.015 mm, Pitch 2.54 mm", PackageReference=KTT0003A, Packaging="Tape and Reel", Pins=2, REACH SVHC="No SVHC", RoHSCompliant=true, Voltage Rating (DC)="50 V", Width="0.8 mm"
U2: "8 SOIC 3.90mm(.150in) TUBECAN Flexible Data Rate Transceiver", Manufacturer=Microchip, Supplier Part Number 1=MCP2562FD-E/SN-ND, Category="Interface ICs", ComponentLink1Description=https://datasheet.ciiva.com/46406/1821190-46406053.pdf?src-supplier=Element14, ComponentLink1URL=https://datasheet.ciiva.com/46406/1821190-46406053.pdf?src-supplier=Element14, ComponentLink2Description=https://datasheet.ciiva.com/48512/mcp2562fd-e-mf-eng-tds-48512074.pdf?src-supplier=Distrelec, ComponentLink2URL=https://datasheet.ciiva.com/48512/mcp2562fd-e-mf-eng-tds-48512074.pdf?src-supplier=Distrelec, ComponentLink3Description=https://datasheet.ciiva.com/48473/20005284a-48473180.pdf?src-supplier=Avnet, ComponentLink3URL=https://datasheet.ciiva.com/48473/20005284a-48473180.pdf?src-supplier=Avnet, ComponentLink4Description=https://datasheet.ciiva.com/46406/1821190-46406061.pdf?src-supplier=Element14, ComponentLink4URL=https://datasheet.ciiva.com/46406/1821190-46406061.pdf?src-supplier=Element14, Manufacturer Part Number=MCP2562FD-E/SN, Pricing 1="1=0.96000, 25=0.80000, 100=0.73000 (USD)", RoHS=Yes, Stock 1=1433, Supplier 1=Digi-Key
U3: library part CMP-2000-07604-2, "IC REG LINEAR 3.3V 300MA SOT23-5", Case/Package=SOT-23-5, Dropout Voltage=380mV, Max Input Voltage=5.5V, Max Operating Temperature=125°C, Max Output Current=300mA, Min Input Voltage=2.5V, Min Operating Temperature=-40°C, Nominal Output Voltage=3.3V, Operating Supply Current=42uA, Power Supply Rejection Ratio (PSRR)=60dB, Quiescent Current=38uA, Accuracy=3%, Height=1.1mm, Length=2.9mm, Mount="Surface Mount", Number of Outputs=1, Number of Pins=5, Output Current=300mA, Output Type=Fixed, Output Voltage=3.3V, Packaging="Tape and Reel", REACH SVHC="No SVHC", Width=1.6mm
U4: library part CMP-1305-00036-1, "Single Supply Quad Comparators, 0 to 70 degC, 14-Pin SOIC, Pb-Free, Tape and Reel", Manufacturer="On Semiconductor", ComponentLink1Description="Manufacturer URL", ComponentLink1URL=http://www.onsemi.com/, ComponentLink2Description=Datasheet, ComponentLink2URL=http://www.onsemi.com/pub_link/Collateral/LM339-D.PDF, ComponentLink3Description="Package Specification", ComponentLink3URL=http://www.onsemi.com/pub_link/Collateral/751A-03.PDF, DatasheetVersion="Rev. 20", IO Typ (mA)=16, Mounting Technology="Surface Mount", PackageDescription="14-Pin Small Outline Integrated Circuit, Body 8.65 x 3.9 mm, Pitch 1.27 mm", PackageReference=SOIC-14-751A-03, PackageVersion="Rev. K, 05/2011", Packing="Tape and Reel", PartNumber=LM339DR2G, RoHS=TRUE
U5: library part CMP-0237-00257-3, "ARM Cortex-M3 32-bit MCU, 32 KB Flash, 10 KB Internal RAM, 37 I/Os, 48-pin LQFP, -40 to 105 degC, Tape and Reel", I/Os (High Current)=37, Operating Frequency(F) (Processor speed) (MHz)=72, Supply Voltage(Vcc) min (V)=2, A/D Converter="2x12-bit (10 Channel)", ComponentLink1Description="Manufacturer URL", ComponentLink1URL=http://www.st.com/web/en/home.html, ComponentLink2Description=Datasheet, ComponentLink2URL=http://www.st.com/st-web-ui/static/active/en/resource/technical/document/datasheet/CD00210843.pdf, ComponentLink3Description="Package Specification", ComponentLink3URL=http://www.st.com/st-web-ui/static/active/en/resource/technical/document/datasheet/DM00058181.pdf, Core="ARM Cortex-M3", DatasheetVersion="Rev. 6", FLASH Size (Prog) (kB)=32, Internal RAM Size (kB)=10, Mounting Technology="Surface Mount", PackageDescription="48-Pin Low Profile Quad Flat Package, 7 x 7 mm Body, 0.5 mm Pitch", PackageReference=LQFP48, PackageVersion="Rev. 6, 06/2013", Packing="Tape and Reel", PartNumber=STM32F103C6T7ATR
X1: library part CMP-2000-05034-1, "Microprocessor Crystal, 8 MHz, 18 PF, -40 to 85 degC, 2-Pin SMD, RoHS, Tape and Reel", ESR (Equivalent Series Resistance)=100Ohm, Frequency=8MHz, Frequency Stability=±30ppm, Frequency Tolerance=±20ppm, Load Capacitance=18pF, Manufacturer=Abracon, Operating Mode=Fundamental, Operating Temperature=-40degC~85degC, Package / Case=2-SMD, Package Description="2-Pin Surface Mount Device, Body 6 x 3.5 mm", Package Reference=ABM7, Standard Package=1,000, 3D Model="ABM7.pdf /  / ABM7.stp", Catalog Drawings="ABM7SeriesTop /  / ABM7SeriesSide /  / ABM7SeriesBottom", Category=CrystalsandOscillators, Datasheet URL=https://datasheet.ciiva.com/1357/1718755-1357277.pdf, Datasheet Version=Dec-17, Family=Crystals, Featured Product=ABM7andABM11Crystals, Height="0.055\"(1.40mm)", Manufacturer URL=http://www.abracon.com/, Mounting Type=SurfaceMount, Online Catalog=ABM7Series, Other Names="535-9831-2 / ABM7-8.000MHZ-D-2-Y-T / ABM78000MHZD2YT", Packaging=Tape&Reel(TR), RoHS Information=RoHS2/REACHCompliance, Series=ABM7, Size / Dimension="0.236\"Lx0.138\"W(6.00mmx3.50mm)", Type=MHzCrystal

## Via types
v1: diameter 23.62, hole 12, Top Layer to Bottom Layer, 22 vias

## Nets (pads, with @x,y where several pads share a name; then routed paths per layer and width w, separated by ;. In a path a pad name is that pad's centre, name@x,y a point inside that pad or via, vN(x,y) a via of type N, cw(c..) or ccw(c..) an arc to the next point about the centre after c; other vN are vias at no path point)
3V3_VREF: C14.1 R3.1 R6.2 U4.8 U4.10 | length 380.3
  Bottom Layer w15: U4.10 2112.92,2596.8 2112.92,2576.06 2136.54,2552.44 2187.21,2552.44 2205.08,2570.31 2205.08,2596.8 U4.8 2209,2594.47 2212.92,2590.55 C14.1 2282.18,2594 2337.28,2594 2341.24,2597.96 2368.17,2597.96 ; R3.1@2382.9,2597.96 2368.17,2597.96 ; R3.1 2395.22,2597.96 2390.3,2597.96 2368.17,2597.96
12V_VREF: C13.1 R22.1 R23.2 U4.4 U4.6 | length 641.2
  Bottom Layer w10: U4.4 2059,2728.44 2068,2719.44 2142.66,2719.44 ; 2145.93,2716.18 2208.54,2653.57 ; U4.6 2159,2729.25 2149.19,2719.44 2142.66,2719.44 ; R22.1@2394.73,2648.66 2394.23,2648.16 2339.21,2648.16 2338.71,2647.66 2335.76,2650.61 2280.67,2650.61 2277.72,2653.57 2208.54,2653.57 ; 2142.66,2719.44 2208.54,2653.57
+3V3: C7.1 C8.1 C10.1 C11.1 C12.1 C15.1 C16.1 P1.3 R3.2 R4.2 R7.2 R12.2 U2.5 U3.5 U5.1 U5.9 U5.24 U5.36 U5.48 | length 224.5
  Bottom Layer w10: C10.1 C10.1@2150.44,2965.4 ; U5.9@2244.02,3028.03 U5.9@2244.02,3029.61
  Bottom Layer w15: C8.1 2220.47,2383 2229.26,2374.21 U2.5
  Bottom Layer w20: U3.5 3589.59,2970.19 3589.59,2903.41 C16.1
+5V0: C2.1 C9.1 D2.1 U1.3 U2.3 | length 271.1
  Bottom Layer w15: C9.1 2024.31,2323.52 C9.1@2032.2,2323.52 ; C9.1@2027.3,2318.63 C9.1@2032.2,2323.52 ; U2.3 2097.74,2323.52 C9.1@2032.2,2323.52 ; U1.3 3190.55,3066.93 3281.6,3066.93 3308.05,3093.38 C2.1
  Bottom Layer w40: D2.1 U1.3@3156.35,3055.12
+12V0: C1.1 C4.1 F1.2 R1.2 R2.2 R5.2 R8.2 R22.2 U1.1 U4.3 | length 754.5
  Bottom Layer w20: R1.2 1937.82,2465.71 2008.27,2465.71 R8.2 ; U4.3 2009,2821.98 2023.96,2836.94 R2.2 R5.2 ; U1.1@3217.8,3267.72 3252.32,3302.23 C4.1 ; C1.1 3302,3314.23 C4.1 ; F1.2 3545,3237.76 3533.28,3226.05 3391.42,3226.05 3365.87,3251.59 3337.59,3279.88 3337.59,3289.51 3324.86,3302.23 C4.1
+B_BACKUP: J1.10 J2.10 | length 1077.2
  Bottom Layer w20: J1.10@3400.53,2638 3400.53,2652.12 3416.75,2668.34 3430.87,2668.34 3431.81,2669.28 3782.24,2669.28 3825.55,2625.98 3908.05,2625.98 3937.01,2654.94 3937.01,3055.02 3890.42,3101.61 J2.10
ACC_CAN_H: J1.7 J2.7 | length 1148.7
  Top Layer w15: J1.7@3140.69,2638 3140.69,2606.31 3225,2522 3599,2522 3659,2582 3773,2582 3815.5,2624.5 3917.5,2624.5 3930.48,2637.48 3930.48,2801.7 3890.42,2841.76 J2.7
ACC_CAN_L: J1.18 J2.18 | length 1123.3
  Top Layer w15: J1.18@3168.24,2775.8 3168.24,2741.32 3184,2725.56 3184,2599.35 3241.35,2542 3471,2542 3599,2670 3787.21,2670 3796,2678.79 3796,2841.69 3752.62,2885.07 J2.18
BLUE_LED: R10.1 U5.25 | length 773.4
  Bottom Layer w8: 2556.24,3327.9 2556.24,3362.39 2592.84,3398.98 2976.14,3398.98 2977.49,3397.64 3133.86,3397.64 3218.22,3482 R10.1
BOOT0: R11.2 U5.44 | length 151
  Bottom Layer w10: 1883.48,3255.81 1888.42,3260.75 1957.6,3260.75 1957.68,3260.83 ; U5.44 2451.85,3184.13 2486.09,3184.13 2492.9,3190.94 R11.2
CAN1_RX: U2.4 U5.45 | length 1221.6
  Bottom Layer w10: U2.4 2098.63,2374.42 2098.63,2435.69 2144.01,2481.06 2431.41,2481.06 2487.44,2537.09 2487.44,2926.86 2555.12,2994.53 2555.12,3114.17 2504.92,3164.37 U5.45
CAN1_TX: U2.1 U5.46 | length 1484.7
  Bottom Layer w10: U2.1@2100.82,2224.41 2007.87,2224.41 1983.5,2248.78 1983.5,2341.77 2137.8,2496.06 2425.2,2496.06 2472.44,2543.31 2472.44,2933.07 2539.37,3000 2539.37,3102.36 2497.05,3144.69 U5.46
EPS_TO_LKAS_RX: J1.12 SW1.C2 | length 1528.2
  Top Layer w15: J1.12@2648.56,2775.8 2648.56,2843.56 2863.51,3058.51 3381.75,3058.51 3826.06,3502.82 SW1.C2
EPS_TO_LKAS_TX: J2.12 R2.1 SW1.2B U4.5 | length 3735.3
  Top Layer w15: v1(2105,2743.44) 2491.47,2743.44 2507.87,2759.84 2507.87,2807.09 2547.24,2846.46 2589.54,2846.46 2605,2831 2605,2720 2570.87,2685.87 2570.87,2513.13 2718.61,2365.39 J2.12 3903.76,2365.39 3944,2405.62 3944,2620.76 3950.48,2627.23 3950.48,3150 3971,3170.52 3971,3275 v1(3970,3276)
  Bottom Layer w15: R2.1 2083.07,2876.24 2088.37,2870.94 2090.95,2870.94 2109,2852.89 U4.5 2106.65,2807.81 2106.65,2745.09 v1(2105,2743.44) ; SW1.2B 3961.07,3277.65 3968.35,3277.65 v1(3970,3276)
EPS_TO_LKAS_TX1: R1.1 SW1.2A U4.14 | length 3803.6
  Bottom Layer w10: U4.14 1909,2588.91 1937,2560.9 R1.1 ; R1.1@1932.08,2525.59 1874.02,2467.53 1874.02,2255.91 1959.88,2170.04 3840.96,2170.04 3997.07,2326.14 3997.07,3205.95 3942.31,3260.71 3765.47,3260.71 3725.94,3221.18 SW1.2A
F_CAN_H: J1.2 J2.2 U2.7 | length 1895.3
  Top Layer w15: J1.2@2707.61,2638 2715.29,2630.32 2715.29,2586.43 2891.72,2410 3865.49,2410 J2.2
  Bottom Layer w15: U2.7 2460.21,2274.21 2704.89,2518.89 2704.89,2635.28 J1.2@2707.61,2638
F_CAN_L: J1.13 J2.13 U2.6 | length 1935.8
  Top Layer w15: J1.13@2735.17,2775.8 2735.17,2741.32 2751,2725.49 2751,2579 2885.79,2444.21 3644.21,2444.21 3661.32,2461.32 J2.13@3716.96,2461.32
  Bottom Layer w15: U2.6 2441.21,2324.21 2662,2545 2662,2679.01 2735.17,2752.18 J1.13@2735.17,2775.8
GND: C1.2 C2.2 C3.2 C4.2 C5.2 C6.2 C7.2 C8.2 C9.2 C10.2 C11.2 C12.2 C13.2 C14.2 C15.2 C16.2 J1.14 J2.14 J3.5 LED1.1 LED2.1 P1.5 P1.7 P1.11 R6.1 R11.1 R13.2 R23.1 U1.2 U1.4 U2.2 U2.8 U3.2 U4.12 U5.8 U5.23 U5.35 U5.47 | length 1298.9
  Bottom Layer w10: C11.2 1995.47,3667.59 ; C9.2@2033.77,2274.9 2097.74,2274.9 U2.2 ; C10.2@2141.72,2913.39 C10.2@2143.7,2915.36 ; C10.2 2148.62,2913.39 C10.2@2158.39,2923.15 ; v1(2224,2542.44) 2224.43,2542.87 2278.3,2542.87 C14.2 2281.18,2540.86 2338.28,2540.86 R6.1 ; 2263.7,3022.56 2263.7,3055.04 U5.8 ; C13.2@2277.72,2700.81 2280.67,2703.76 2335.76,2703.76 R23.1@2338.71,2706.72 ; C6.2 2344,2807.09 ; v1(2342.52,2846.46) 2344,2844.98 2344,2807.09 ; C5.2 2344,2807.09
  Bottom Layer w20: v1(2135.03,2441.24) 2136.01,2441.24 2139.93,2437.32 2168.46,2437.32 2168.78,2437.01 C8.2 ; C8.2@2175.38,2437.01 2175.38,2301 2251.97,2224.41 U2.8@2329.06,2224.41 ; C6.2 C6.2@2322.61,2799.44 ; v1(3100.13,3167.35) 3101.11,3167.35 3103.11,3165.35 U1.2 ; U1.2@3181.49,3165.35 3184.21,3168.07 3269.44,3168.07 3303.14,3201.77 C4.2 3311,3198.77 C2.2 ; v1(3199,3376) 3199.98,3376 3203.98,3372 C1.2 ; v1(3419.63,3062.01) 3420.32,3061.31 3420.32,3040.35 3442.46,3018.22 3446.11,3018.22 3453.33,3010.99 3483.83,3010.99 U3.2 ; v1(3500,2902) 3500.5,2902.5 3540.2,2902.5 C16.2
  other v1: 1894.48,3525.28
IGN1: F1.1 J1.19 J2.19 | length 852.8
  Top Layer w50: J1.19@3254.86,2775.8 3254.86,2799.42 3427.12,2971.69 J2.19
  Bottom Layer w50: F1.1 3555.04,3113.06 3628.57,3113.06 3647.82,3093.81 3647.82,3030.63 3706.76,2971.69 J2.19
LDW_OFF_IND: J1.11 J2.11 | length 1564.3
  Top Layer w20: J1.11@2561.95,2775.8 2561.95,2742.68 2543.31,2724.03 2543.31,2494.17 2758.71,2278.77 J2.11
LDW_OFF_SW: J1.8 J2.8 | length 916.9
  Top Layer w15: J1.8@3227.3,2638 3227.3,2614.38 3279.68,2562 3462.72,2562 3655,2754.28 3655,2891.35 3692.03,2928.38 J2.8
LKAS_TO_EPS_RX: J2.1 SW1.C1 | length 2322.2
  Top Layer w15: SW1.C1@3826.8,3213.48 cw(c3970.36,3213.48) 3868.85,3315 3975,3315 3998,3292 3998,2387 3933.08,2322.08 J2.1
  Bottom Layer w15: SW1.C1 3844.21,3193.07 3855.61,3193.07 3893.04,3155.63 3964.57,3084.11 3964.57,2396.23 3890.42,2322.08 J2.1
LKAS_TO_EPS_TX: J1.1 R5.1 SW1.1B U4.7 | length 3270.9
  Top Layer w15: v1(2450.63,2688.98) 2505.54,2688.98 2509.48,2692.91 v1(2511.81,2692.91) ; 3460.94,3037.7 3926.06,3502.82 SW1.1B
  Bottom Layer w8: 2621,2650.77 2621,2697.9 2605,2713.9 2605,2833.35 2629.92,2858.27 3374.02,2858.27 3389.76,2842.52 3783.46,2842.52 3803.15,2862.2 3803.15,3062.99 3661.42,3204.72 v1(3661.42,3238.18)
  Bottom Layer w15: R5.1 2083.02,2931.24 2088.31,2925.94 2105.03,2925.94 2122.05,2908.93 2122.05,2878.87 2130.83,2870.08 2188.98,2870.08 2209,2850.06 U4.7 2209,2771.31 2232.32,2747.99 2421.3,2747.99 2448.98,2720.31 2448.98,2690.63 v1(2450.63,2688.98) ; v1(2511.81,2692.91) 2543.31,2661.42 2610.35,2661.42 2621,2650.77 J1.1@2621,2638
LKAS_TO_EPS_TX1: R8.1 SW1.1A U4.13 | length 3454.6
  Bottom Layer w10: U4.13 1963.63,2596.08 1963.63,2564.49 2004.18,2523.95 R8.1 ; R8.1@2014.02,2523.95 2043.31,2494.66 2043.31,2422.79 1968.5,2347.98 1968.5,2192.91 1976.38,2185.04 3834.75,2185.04 3982.07,2332.35 3982.07,3147.85 3925.94,3203.98 SW1.1A
NetC3_1: C3.1 D1.2 D2.2 U3.1 U3.3 | length 511
  Bottom Layer w20: D2.2 D2.2@3329.55,3000 ; D1.2 3420,3123.45 3395.55,3099 3365.72,3099 3354,3087.28 3354,3024.45 D2.2@3329.55,3000 ; U3.3 3519.28,3045.4 3531,3033.69 3531,2987 3517.59,2973.59 3489.81,2973.59 U3.1 3440.78,2970.6 3424.03,2987.35 C3.1 3421.97,2987.35 3409.32,3000 D2.2@3329.55,3000
NetLED1_2: LED1.2 R9.2 | length 74.1
  Bottom Layer w10: R9.2 3360.53,3435 3370.33,3425.2 v1(3374.02,3425.2)
NetLED2_2: LED2.2 R10.2 | length 82.3
  Bottom Layer w8: R10.2 3368.1,3482 3377.66,3472.44 v1(3381.89,3472.44)
NRST: P1.12 R12.1 U5.7 | length 659.5
  Bottom Layer w8: P1.12@2650,3456 2650,3451.57 2635.93,3437.5 2581.44,3437.5 2572.38,3446.56 2572.38,3517.44 2602.18,3547.24 2973.22,3547.24 3016.76,3503.71 3021.68,3503.71 3030.47,3494.91 R12.1
OSC_IN: C5.1 U5.5 X1.2 | length 299
  Bottom Layer w10: U5.5 2322.83,3011.81 2372.75,2961.9 2386.89,2961.9 2419.29,2929.5 X1.2 ; C5.1@2419.29,2798.23 C5.1@2422.24,2795.28 ; X1.2@2419.29,2919.29 2430.12,2908.46 C5.1
OSC_OUT: C6.1 U5.6 X1.1 | length 296
  Bottom Layer w10: X1.1 X1.1@2250,2933.07 ; C6.1 2257.87,2925.2 X1.1@2250,2933.07 ; U5.6 2303.15,2960.93 2297.29,2955.08 2272.01,2955.08 X1.1@2250,2933.07
PA0: U5.10
PA1: U5.11
PA4: U5.14
PA5: U5.15
PA6: U5.16
PA7: U5.17
PA8: U5.29
PA15: U5.38
PB0: U5.18
PB1: U5.19
PB2: U5.20
PB3: U5.39
PB4: U5.40
PB5: U5.41
PB6: U5.42
PB7: U5.43
PB10: U5.21
PB11: U5.22
PB14: U5.27
PB15: U5.28
PC13: U5.2
PC14: U5.3
PC15: U5.4
SHIELD: J3.6 J3.7 J3.8 J3.9 J3.10 J3.11 R13.1
STATUS: R9.1 U5.26 | length 726.3
  Bottom Layer w8: 2582.68,3335.95 2582.68,3370.44 2598.22,3385.98 2970.76,3385.98 2974.1,3382.64 3140.07,3382.64 3192.43,3435 R9.1
SWCLK: P1.6 U5.37 | length 458.7
  Top Layer w8: v1(2531.5,3409.45) 2533.46,3407.48 2533.46,3364.17 v1(2535.43,3362.2)
  Bottom Layer w8: U5.37 2495.08,3321.85 v1(2535.43,3362.2) ; v1(2531.5,3409.45) 2535.43,3405.51 2562.99,3405.51 2578.74,3421.26 2578.98,3421.26 2582.22,3424.5 2771.16,3424.5 P1.6
SWDIO: P1.4 U5.34 | length 581.2
  Bottom Layer w7: U5.34 2362.2,3405.51 2370.08,3413.39 2484.25,3413.39 2509.12,3388.52 2563.91,3388.52 2587.4,3412 2808.66,3412 P1.4
UART2_RX: R4.1 U4.2 U5.13 | length 301.7
  Bottom Layer w10: U4.2 1960.8,2811.96 1960.8,2880.1 R4.1 1962.6,2886.82 1985.39,2909.61 1985.39,3086.77 ; U5.13@2120.7,3105.24 2120.78,3105.31 U5.13
UART2_TX: U4.9 U5.12 | length 559.9
  Bottom Layer w10: 2000.39,3075.2 2000.39,2903.4 1987.58,2890.59 1987.58,2768.32 2097.04,2658.87 2112.66,2658.87 2159,2612.53 U4.9
UART3_RX: R7.1 U4.1 U5.31 | length 1039.4
  Bottom Layer w10: U4.1 1909,2821.98 1933.07,2846.05 1933.07,2902.56 1962.6,2932.09 R7.1 1962.6,2941.93 1913.39,2991.14 1913.39,3330.27 2013.08,3429.96 2282.14,3429.96 2303.07,3409.03 2303.07,3372.13 U5.31
UART3_TX: U4.11 U5.30 | length 1294.5
  Top Layer w10: v1(1888.1,3014.09) 1888.93,3014.92 1936.18,3014.92 v1(1937.01,3015.75)
  Bottom Layer w10: v1(1888.1,3014.09) 1885.5,3011.48 1885.5,2992.08 1874.02,2980.6 1874.02,2796.36 1981.4,2688.98 1996.06,2688.98 2053.73,2631.31 2053.73,2605.99 U4.11 ; v1(1937.01,3015.75) 1937.01,3019.43 1931.54,3024.9 1931.54,3327.21 2019.29,3414.96 2275.93,3414.96 2283.39,3407.5 2283.39,3372.13 U5.30
USB_N: R14.1 U5.32 | length 95.5
  Bottom Layer w10: R14.1 2306.1,3457.68 2322.83,3440.94 U5.32
USB_P: R15.1 U5.33 | length 159
  Bottom Layer w10: R15.1 2306.1,3512.8 2318.82,3500.08 2319.18,3500.08 2342.52,3476.74 U5.33
USB_R_N: J3.2 R14.2 | length 219.8
  Top Layer w10: J3.2 2104.33,3372.05 v1(2188.98,3456.69)
  Bottom Layer w10: v1@2196.85,3456.69 2249.02,3456.69 R14.2
USB_R_P: J3.3 R15.2 | length 336.9
  Top Layer w10: J3.3 2114.17,3346.46 2212.6,3444.88 2212.6,3480.32 2192.91,3500 2192.66,3500 2184.79,3507.87 v1(2181.1,3507.87)
  Bottom Layer w10: v1@2188.98,3507.87 2192.66,3507.87 2200.54,3515.75 R15.2
V_USB: D1.1 J3.1 | length 245.9
  Bottom Layer w10: v1(3381.89,3535.43) 3420,3497.32 D1.1
pads on no net: J1.3 J1.4 J1.5 J1.6 J1.9 J1.15 J1.16 J1.17 J1.20 J2. J2.3 J2.4 J2.5 J2.6 J2.9 J2.15 J2.16 J2.17 J2.20 J3.4 P1.1 P1.2 P1.8 P1.9 P1.10 P1.13 P1.14 U3.4

## Keep-outs
Keep-Out Layer:
  lines w10: 1830,2646.44 1830,3534.44 ; 1830,2674 1830,2142 4028,2142 4028,3562 1830,3562

## Silkscreen, mask and mechanical layers (free items; w line width, h text height)
Top Overlay:
  text "ML2020 V2I1" at 2358.28,4848.16 h60 r270

## Text inside footprints (layer, text, board x,y; h text height)
J1: Top Overlay "1" at 2551,2628.63 h60 r180; Top Overlay "11" at 2521,2768.63 h60 r180; Top Overlay "20" at 3511,2768.63 h60 r180; Top Overlay "10" at 3551,2628.63 h60 r180
J2: Top Overlay "10" at 3836.8,3241.61 h60 r270; Top Overlay "20" at 3696.8,3221.61 h60 r270; Top Overlay "11" at 3696.8,2221.61 h60 r270; Top Overlay "1" at 3836.8,2261.61 h60 r270
J3: Mechanical 1 "PCB Edge" at 1926.69,3866.46 h39.37 r270
P1: Top Overlay "1" at 2994.47,3542.44 h36 r90; Top Overlay "2" at 2994.78,3480.13 h36 r90